# EAGLE board assembled (EAGLE 7.4.0)

Size 20 x 15 mm. Coordinates in mm from the lower left corner, seen from the top.
Outline: 0,0 20,0 20,15 0,15 0,0
Copper layers used: 
Design rules "default": track to track 8mil

## Footprints (pad centres in the part's own frame; a part is rotated, then mirrored left to right if it is on the bottom)
0402 = smd 0.6 x 0.6: 1 -0.5,0; 2 0.5,0
0603 = smd 0.9 x 0.9: 1 -0.8,0; 2 0.8,0
SOT23 = smd 0.6 x 0.8: 1 -0.95,-1; 2 0.95,-1; 3 0,1

## Placement (x,y rotation side)
C1  100n  [0402]  5,3 0 top
C2  1u  [0402]  8,3 90 top
C3  10n  [0402]  9,8 270 bottom
R1  10k  [0603]  6,10 0 top
R2  1k  [0603]  5,6 0 bottom
U1  AMS1117  [SOT23]  12,6 180 top

## Library data of the parts
C1-C3 R1 R2 U1 = smd-lib